# Altium PCB ICSP INPUT.PcbDoc
Units mm, origin at the board's own origin, x right, y up, seen from the top; angles counter-clockwise.
Board outline 24.26 x 31.11 mm, 2 copper layers (Top Layer, Bottom Layer); 4 components, 7 nets, 16 pads, 0 vias.
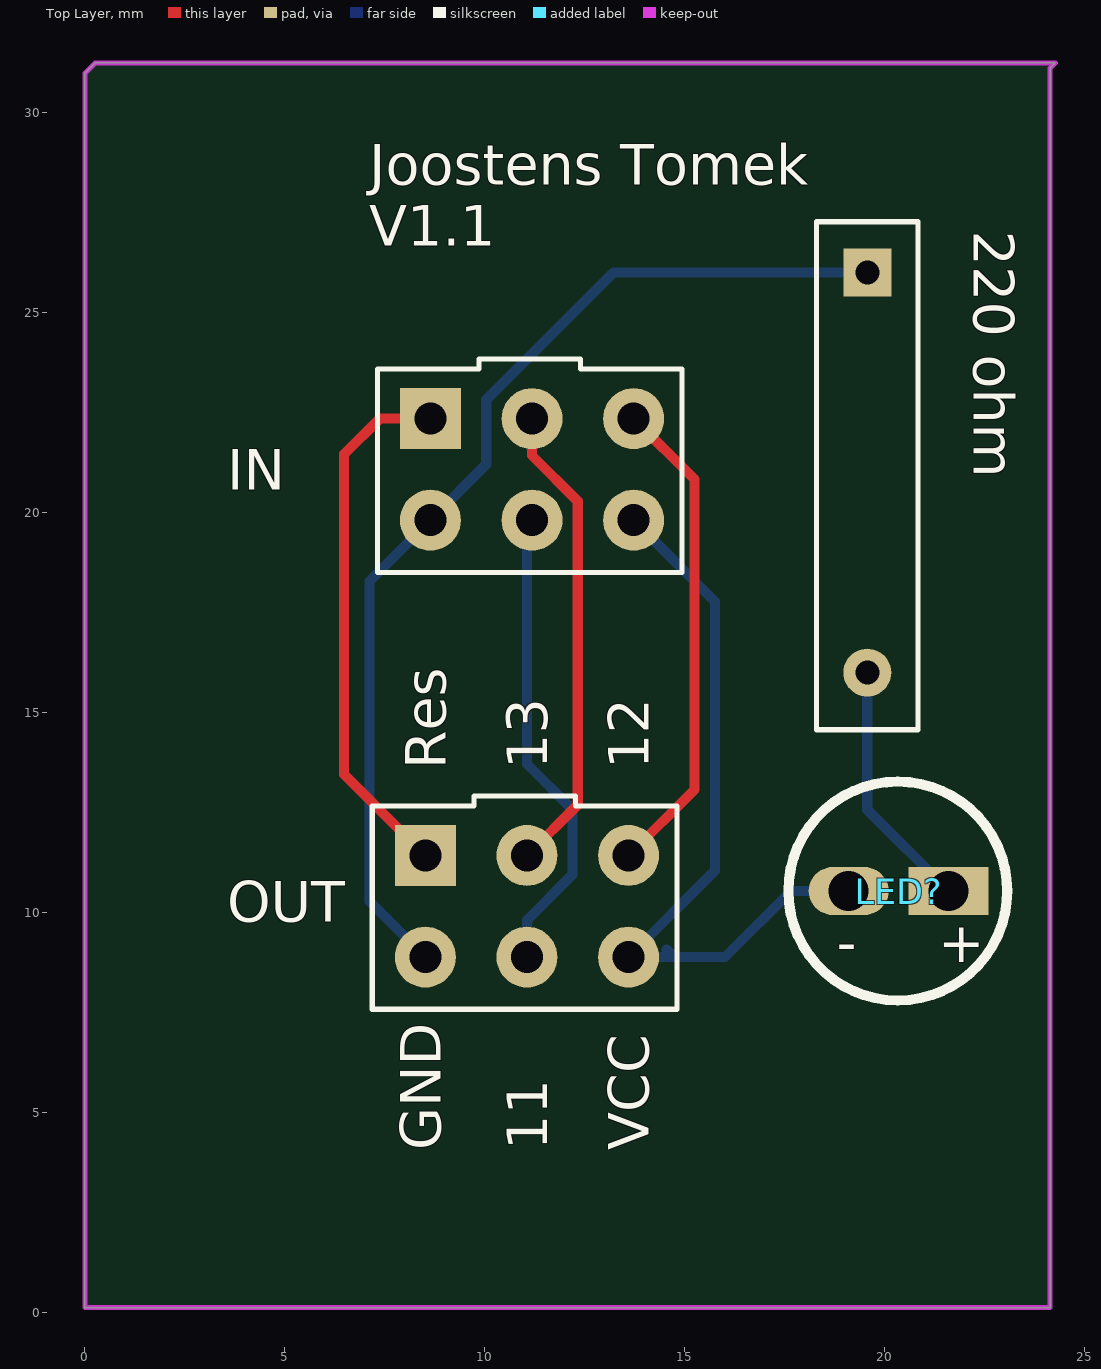
[diagram p0: Top Layer view]
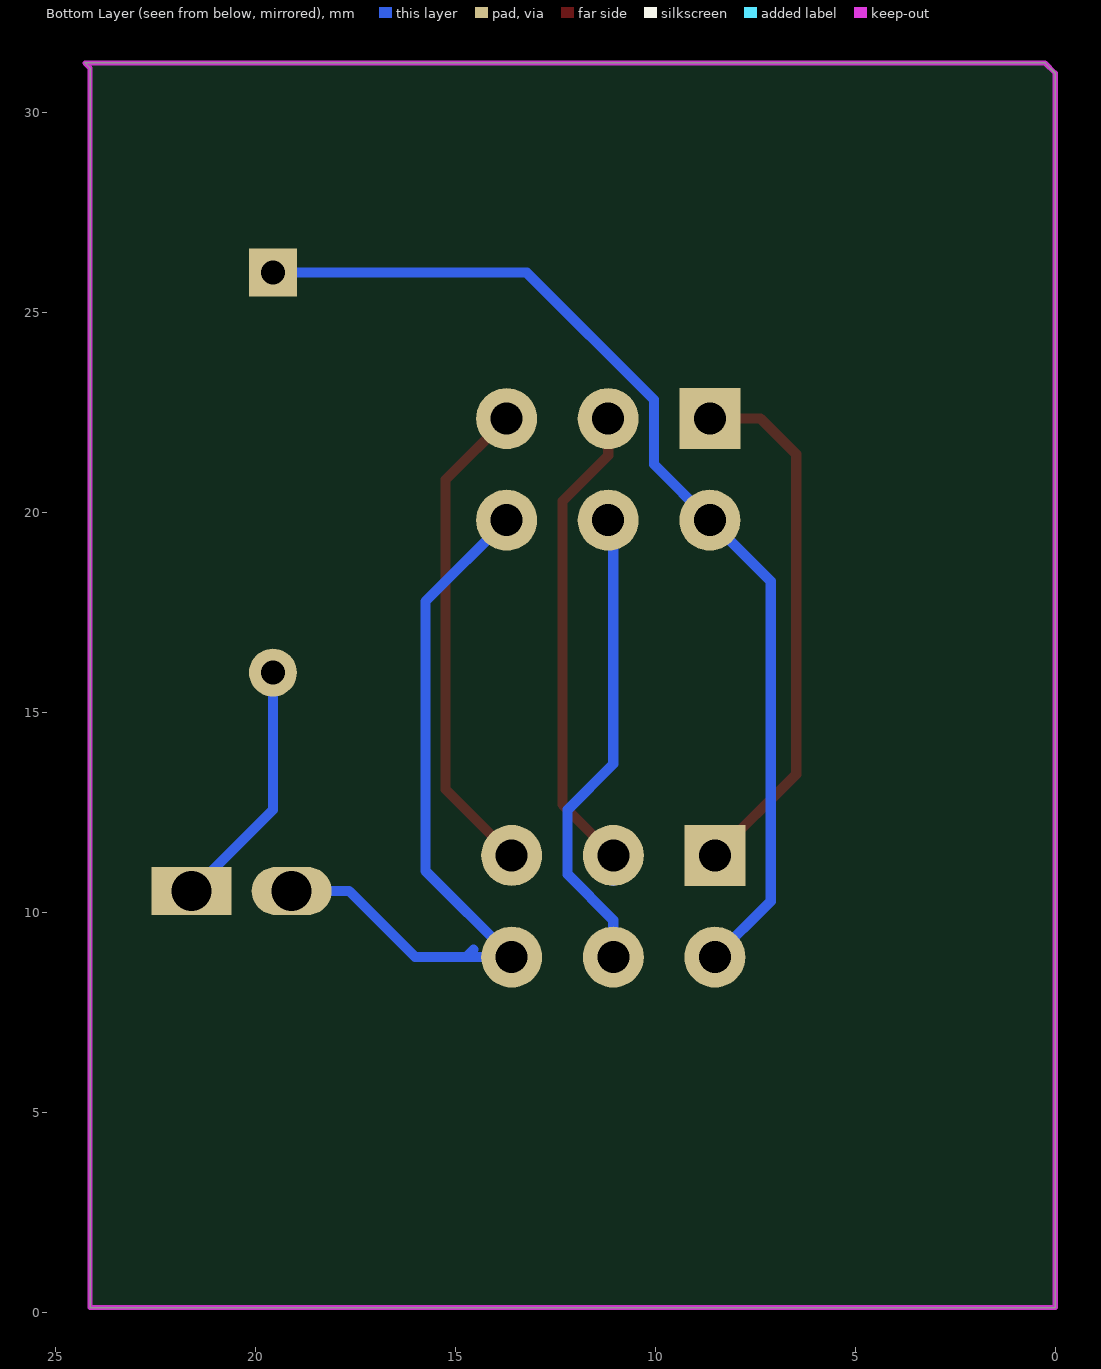
[diagram p1: Bottom Layer view, seen from below]

## Layer stack, top to bottom
Top Solder: solder mask 0.0102, Solder Resist, Dk 3.5
Top Layer: signal copper 0.0356
Dielectric 1: dielectric 0.32, FR-4, Dk 4.8
Bottom Layer: signal copper 0.0356
Bottom Solder: solder mask 0.0102, Solder Resist, Dk 3.5

## Board outline
0,0.127 24.13,0.127 24.13,31.115 24.257,31.242 0.254,31.242 0,30.988

## Design rules (kind name [scope] priority, off if disabled: settings)
Clearance [All] p1: gap=0.254
PolygonConnect [All] p1: connectstyle=Relief reliefconductorwidth=0.254 reliefentries=4 polygonreliefangle="90 Angle" airgapwidth=0.254
RoutingVias [All] p1: holewidth=0.711 width=1.27 viastyle="Through Hole" minholewidth=0.711 minwidth=1.27 maxholewidth=0.711 maxwidth=1.27
SolderMaskExpansion [All] p1: expansion=0.102
Width [All] p1: maxlimit=0.254 minlimit=0.254 preferedwidth=0.254
30 further rules are at their usual default settings.

## Components (designator, comment, footprint, x,y, rotation, side; value= is the part's Value field where it differs from the comment)
"220 ohm" "Resistor" Resistor 19.558,26.002 r270 top
IN "ICSP" ICSP 11.118,21.048 r0 top (schematic designator "ICSP IN")
LED? "LED 3mm BLUE" "LED 3mm BLUE" 32.258,10.287 r180 top
OUT "ICSP" ICSP 10.991,10.126 r0 top (schematic designator "ICSP OUT")

## Footprints (in the part's own frame and the unit in brackets; to place one, negate y for a bottom-side part, rotate by r counter-clockwise, add the part's x,y. Pads: shape width x height; smd on the part's side, far side on the other; paste and mask are expansions set on the pad)
ICSP [mil] "2x3 header"
  round 60 hole 31.5: 1(-97.72,-48.66) 2(2.28,-48.66) 3(102.28,-48.66) 5(2.28,51.34) 6(102.28,51.34)
  rect 60x60 hole 31.5: 4(-97.72,51.34)
  silkscreen extent -150,-100 150,110, body extent -150,-99 150,99, height 335
"LED 3mm BLUE" [mm] "LED"
  rect 2x1.2 hole 1: 1(10.668,-0.254)
  oval 2x1.2 hole 1: 2(13.168,-0.254)
  silkscreen extent 9.2,-2.99 14.67,2.48, body extent 10.27,-1.91 13.49,1.39, height 4.98
Resistor [mm] "Resistor"
  rect 1.2x1.2 hole 0.6: 1(0,0)
  round 1.2 hole 0.6: 2(10,0)
  silkscreen extent -1.27,-1.27 11.43,1.27, body extent -0.22,-1.3 10.28,1.3, height 2.43

## Part data
IN OUT: "Header 6 pin"

## Nets (pads, with @x,y where several pads share a name; then routed paths per layer and width w, separated by ;. In a path a pad name is that pad's centre, name@x,y a point inside that pad or via, vN(x,y) a via of type N, cw(c..) or ccw(c..) an arc to the next point about the centre after c; other vN are vias at no path point)
"Net220 ohm_1": "220 ohm.1" IN.1 OUT.1 | length 26.6
  Bottom Layer w0.254: OUT.1 7.112,10.287 7.112,18.288 IN.1 10.033,21.209 10.033,22.825 13.21,26.002 19.558,26.002
"Net220 ohm_2": "220 ohm.2" LED?.1 | length 6.3
  Bottom Layer w0.254: 19.558,16.002 19.558,12.573 LED?.1
"NetICSP IN_2": IN.2 OUT.2 | length 12
  Bottom Layer w0.254: OUT.2 11.049,9.814 12.192,10.957 12.192,12.573 11.049,13.716 11.049,19.685 IN.2 ; IN.2@11.327,20.066 IN.2@11.361,20.1
"NetICSP IN_3": IN.3 LED?.2 OUT.3 | length 19.1
  Bottom Layer w0.254: IN.3 15.748,17.78 15.748,11.049 OUT.3 14.732,8.89 ; 14.541,9.08 14.732,8.89 ; LED?.2 17.653,10.541 16.002,8.89 14.732,8.89
"NetICSP IN_4": IN.4 OUT.4 | length 13.4
  Top Layer w0.254: OUT.4 6.477,13.462 6.477,21.463 7.366,22.352 IN.4
"NetICSP IN_5": IN.5 OUT.5 | length 12.6
  Top Layer w0.254: OUT.5 12.319,12.7 12.319,20.285 11.176,21.428 IN.5
  Bottom Layer w0.254: OUT.5@11.049,10.795 OUT.5
"NetICSP IN_6": IN.6 OUT.6 | length 12.4
  Top Layer w0.254: OUT.6 15.24,13.081 15.24,20.828 IN.6
  Bottom Layer w0.254: IN.6 IN.6@13.843,22.225

## Keep-outs
Keep-Out Layer:
  the board outline again, w0.127

## Silkscreen, mask and mechanical layers (free items; w line width, h text height)
Top Overlay:
  text "Joostens Tomek / V1.1" at 7.112,26.67 h1.02
  text "Res" at 9.017,13.589 h1.02 r90
  text "13" at 11.557,13.589 h1.02 r90
  text "12" at 14.097,13.589 h1.02 r90
  text "-" at 18.796,8.763 h1.02
  text "+" at 21.336,8.763 h1.02
  text "GND" at 8.89,4.064 h1.02 r90
  text "11" at 11.557,4.064 h1.02 r90
  text "VCC" at 14.097,4.064 h1.02 r90
Mechanical 1:
  the board outline again, w0.127